# Altium PCB PCB1.PcbDoc
Units mm, origin at the board's own origin, x right, y up, seen from the top; angles counter-clockwise.
Board outline 152.4 x 101.6 mm, 4 copper layers (Top Copper, Signal Layer 1, Signal Layer 2, Bottom Copper), stack 1.57 mm thick; 28 components, 23 nets, 110 pads, 6 vias.
Unrouted connection lines stored in the file: 29.
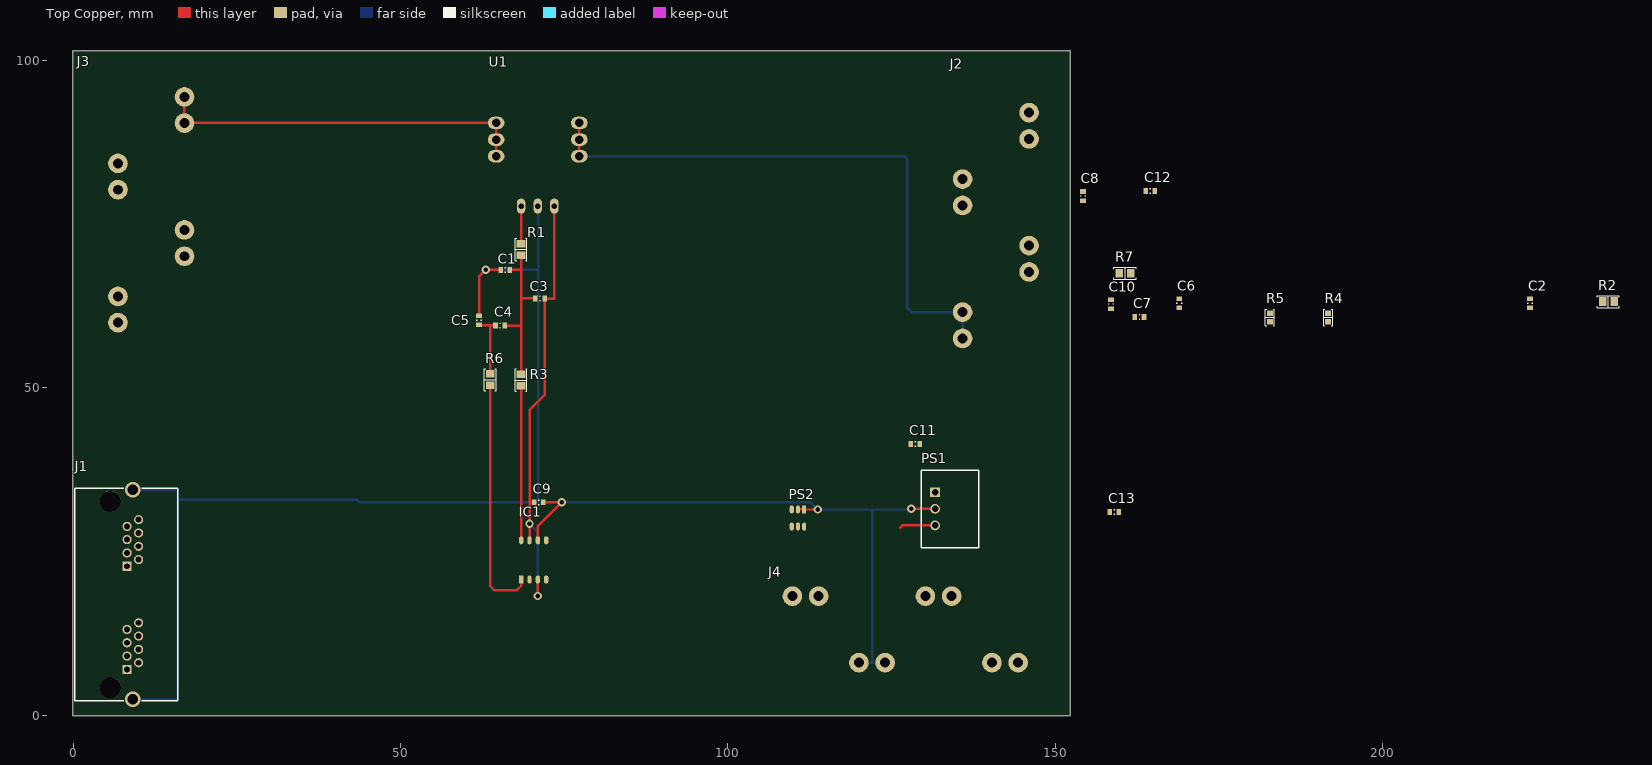
[diagram p0: Top Copper view]
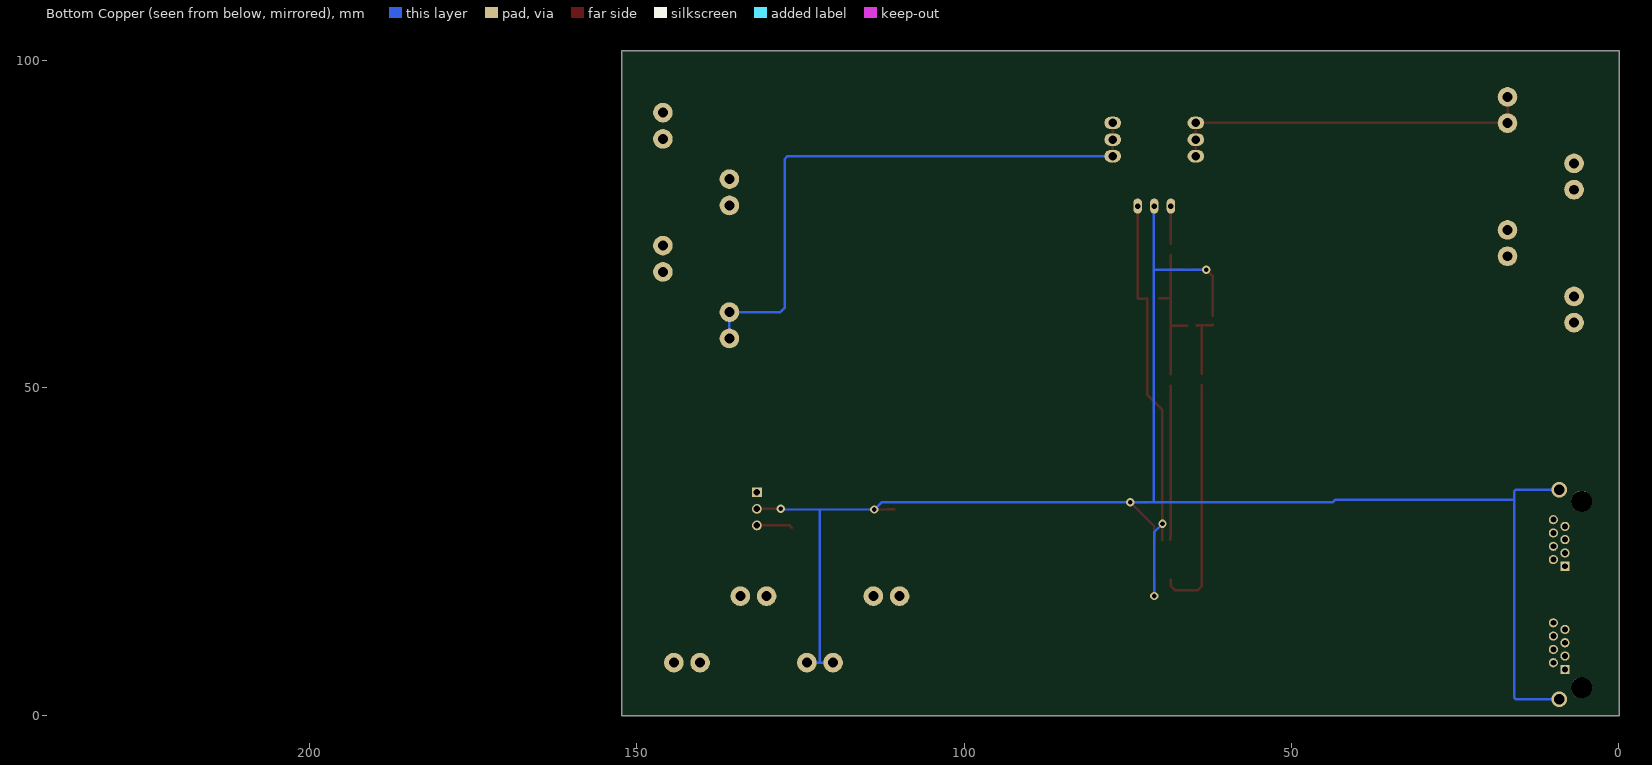
[diagram p1: Bottom Copper view, seen from below]

## Layer stack, top to bottom
Top Mask: solder mask 0.015, Solder Resist, Dk 3.8
Top Copper: signal copper 0.035
Dielectric 1: prepreg 0.2, 7628, Dk 4.6
Signal Layer 1: signal copper 0.0175
Core: core 1.065, FR-4, Dk 4.5
Signal Layer 2: signal copper 0.0175
Dielectric 2: prepreg 0.2, 7628, Dk 4.6
Bottom Copper: signal copper 0.035
Bottom Mask: solder mask 0.015, Solder Resist, Dk 3.8

## Board outline
-0.1,-0.1 152.3,-0.1 152.3,101.5 -0.1,101.5

## Design rules (kind name [scope] priority, off if disabled: settings)
BoardOutlineClearance [All] p1: gap=0.2 ignorepadtopadclearanceinfootprint=FALSE except(0.4: Arc-SplitBarrior Arc-SplitContinuation Track-SplitBarrior Track-SplitContinuation SMDPad-SplitBarrior SMDPad-SplitContinuation THPad-SplitBarrior THPad-SplitContinuation Via-SplitBarrior Via-SplitContinuation Fill-SplitBarrior Fill-SplitContinuation Poly-SplitBarrior Poly-SplitContinuation Region-SplitBarrior Region-SplitContinuation Text-SplitBarrior Text-SplitContinuation)
Clearance "Clearance Bottom Layer" [OnLayer('Bottom Layer')] p1: gap=0.203 ignorepadtopadclearanceinfootprint=TRUE except(0.254: Arc-Text Track-Text SMDPad-Text THPad-Text Via-Text Fill-Text Poly-Text Region-Text Text-Text)
Clearance "Clearance Top Layer" [OnLayer('Top Layer')] p2: gap=0.203 ignorepadtopadclearanceinfootprint=TRUE except(0.254: Arc-Text Track-Text SMDPad-Text THPad-Text Via-Text Fill-Text Poly-Text Region-Text Text-Text)
Clearance [All] p3: gap=0.2 ignorepadtopadclearanceinfootprint=FALSE except(0.089: Arc-Arc Arc-Track Arc-SMDPad Track-Track Track-SMDPad SMDPad-SMDPad; 0.127: Arc-Via Track-Via SMDPad-Via THPad-Via Via-Via; 0.254: Arc-Text Track-Text SMDPad-Text THPad-Text Via-Text Fill-Text Poly-Text Region-Text Text-Text)
HoleSize [All] p1: absolutevalues=TRUE maxlimit=6.3 minlimit=0.2 maxpercent=80.000 minpercent=20.000
MinimumAnnularRing [All] p1: minimumring=0.076
MinimumSolderMaskSliver [All] p1: minsoldermaskwidth=0.1
PolygonConnect PolygonConnect_1 [All] p1: thpad.connectstyle=Relief thpad.reliefconductorwidth=0.508 thpad.reliefentries=4 thpad.polygonreliefangle="90 Angle" thpad.airgapwidth=0.254 smdpad.connectstyle=Relief smdpad.reliefconductorwidth=0.508 smdpad.reliefentries=4 smdpad.polygonreliefangle="90 Angle" smdpad.airgapwidth=0.254 via.connectstyle=Direct via.reliefconductorwidth=0.508 via.reliefentries=4 via.polygonreliefangle="90 Angle" via.airgapwidth=0.254
RoomDefinition Spannungswandlung [InComponentClass('Spannungswandlung')] p1: confinementstyle=ConfineIn formatcopy=TRUE lockcomponents=FALSE outline -25.5,-25.5 25.3,-25.5 25.3,-0.1 -25.5,-0.1
RoomDefinition "Logik Output" [InComponentClass('Logik Output')] p2: confinementstyle=ConfineIn formatcopy=TRUE lockcomponents=FALSE outline -25.5,-25.5 25.3,-25.5 25.3,-0.1 -25.5,-0.1
RoomDefinition LEM [InComponentClass('LEM')] p3: confinementstyle=ConfineIn formatcopy=TRUE lockcomponents=FALSE outline -25.5,-25.5 25.3,-25.5 25.3,-0.1 -25.5,-0.1
RoomDefinition I/O [InComponentClass('I/O')] p4: confinementstyle=ConfineIn formatcopy=TRUE lockcomponents=FALSE outline -25.5,-25.5 25.3,-25.5 25.3,-0.1 -25.5,-0.1
RoutingCorners [All] p1: cornerstyle=Round minsetback=2.54 maxsetback=2.54
RoutingVias [All] p1: holewidth=0.5 width=1 viastyle="Through Hole" minholewidth=0.2 minwidth=0.45 maxholewidth=1 maxwidth=2
SilkToSilkClearance [All] p1: silktosilkclearance=0.1
SilkToSolderMaskClearance [IsPad] p1: minsilkscreentomaskgap=0.1 clearancetoexposedcopper=TRUE
SolderMaskExpansion [All] p1: expansion=0.102 istentingtop=FALSE
Width [All] p1: maxlimit=2.54 minlimit=0.089 preferedwidth=0.381
25 further rules are at their usual default settings.

## Classes and differential pairs
component class Spannungswandlung: C7 C8 C11 C12 PS1 PS2
component class "Logik Output": C2 C4 C5 C6 C9 C10 IC1 J1 R2 R3 R4 R5 R6 R7
component class LEM: C1 C13 R1 U1
component class I/O: J2 J3 J4

## Components (designator, comment, footprint, x,y, rotation, side; value= is the part's Value field where it differs from the comment)
C1 "0.1 µF" C_0603 66,68 r0 top
C2 "22 pF" C_0603 222.531,62.892 r90 top
C3 "2.2 nF" C_0603 71.3,63.6 r0 top
C4 "2.2 nF" C_0603 65.2,59.5 r0 top
C5 "2.2 nF" C_0603 62,60.3 r270 top
C6 "22 pF" C_0603 168.937,62.892 r90 top
C7 "1µF" C0603 162.85,60.8 r0 top
C8 "0.1 µF" C_0603 154.205,79.275 r90 top
C9 "0.1 µF" C_0603 71.1,32.5 r180 top
C10 "0.1 µF" C_0603 158.523,62.765 r90 top
C11 "1µF" C0603 128.6,41.4 r0 top
C12 "1µF" C0603 164.492,80.037 r0 top
C13 "1µF" C0603 159,31 r0 top
IC1 "ADA4940-1ARZ" ADA4940-1ARZ-R7 70.335,23.7 r90 top
J1 "RJHSE538002" RJHSE-5380-02 5.682,32.638 r270 top
J2 "39910-0104" 39910-0104 143.1,74.765 r0 top
J3 "39910-0104" 39910-0104 9.74,77.175 r180 top
J4 "39910-0104" 39910-0104 127.085,10.9 r270 top
PS1 "173010578" FDSM_SIP-3 133.9,31.5 r270 top value="5 W"
PS2 "LT6654AHS6-2.5#TRPBF" LT6654AHS6-2.5#TRPBF 110.7,30.1 r270 top
R1 "100R" R0805 68.41,71.125 r270 top (schematic designator R?)
R2 "1k" R0805 234.469,63.146 r0 top
R3 "140R" R0805 68.4,51.175 r90 top
R4 "49R9" "RES 0603_1608" 191.67,60.733 r90 top
R5 "49R9" "RES 0603_1608" 182.78,60.733 r90 top
R6 "140R" R0805 63.7,51.225 r90 top
R7 "1k" R0805 160.65,67.475 r0 top
U1 "CAS 25-NP" "CAS 25-NP/SP2_LEM" 71,87.9 r180 top

## Footprints (in the part's own frame and the unit in brackets; to place one, negate y for a bottom-side part, rotate by r counter-clockwise, add the part's x,y. Pads: shape width x height; smd on the part's side, far side on the other; paste and mask are expansions set on the pad)
39910-0104 [mm]
  round 3 hole 1.52: 1(-7.26,-17.245) 2(-7.26,-13.225) 3(2.9,-7.085) 4(2.9,-3.065) 5(-7.26,3.075) 6(-7.26,7.095) 7(2.9,13.235) 8(2.9,17.245)
  body extent -9.39,-21.13 9.4,21.03, height 28.33
ADA4940-1ARZ-R7 [mm]
  rect 1.22x0.663 smd: 1(-3,1.905)
  oval 1.22x0.663 smd: 2(-3,0.635) 3(-3,-0.635) 4(-3,-1.905) 5(3,-1.905) 6(3,-0.635) 7(3,0.635) 8(3,1.905)
  body extent -3.1,-2.5 3.1,2.5, height 1.76
C0603 [mm]
  rect 0.7x0.9 smd: 1(-0.7,0) 2(0.7,0)
  silkscreen extent -0.05,-0.35 0.05,0.35, body extent -0.87,-0.48 0.88,0.47, height 1
C_0603 [mm] "Chip Capacitor, Body 1.6x0.8mm, Height 1.0mm, IPC High Density"
  rect 0.7x0.9 smd: 1(-0.7,0) 2(0.7,0)
  silkscreen extent -0.05,-0.35 0.05,0.35, body extent -0.87,-0.47 0.88,0.48, height 1
"CAS 25-NP/SP2_LEM" [mil]
  oval 100x75 hole 51 mask+0: 1(-248.03,100) 2(-248.03,0) 9(251.97,0) 10(251.97,100)
  oval 100x75 hole 51 mask+4: 3(-248.03,-100) 8(251.97,-100)
  oval 51x91 hole 32: 11(101.97,400) 12(1.97,400) 13(-98.03,400)
  body extent -266,-403 273,459, height 630
FDSM_SIP-3 [mm] "Fixed Step Down Regulator Module, SIP-3"
  rect 1.5x1.5 hole 1: 1(-2.54,-2.25)
  round 1.5 hole 1: 2(0,-2.25) 3(2.54,-2.25)
  silkscreen extent -5.92,-4.37 5.92,4.38, body extent -5.8,-4.25 5.8,4.25, height 10.55
LT6654AHS6-2.5#TRPBF [mm]
  rect 1.22x0.62 smd: 1(-1.31,0.95)
  oval 1.22x0.62 smd: 2(-1.31,0) 3(-1.31,-0.95) 4(1.31,-0.95) 5(1.31,0) 6(1.31,0.95)
  body extent -1.38,-1.47 1.41,1.42, height 0.99
R0805 [mm]
  rect 1.15x1.35 smd: 1(-0.875,0) 2(0.875,0)
  silkscreen extent -1.7,-0.9 1.7,0.9, body extent -1,-0.62 1,0.63, height 0.6
"RES 0603_1608" [mm] "Chip Resistor, 2-Leads, Body 1.60x0.80mm, IPC Medium Density"
  rect 0.85x0.95 smd: 1(-0.65,0) 2(0.65,0)
  silkscreen extent -1.27,-0.7 1.27,0.7, body extent -0.8,-0.4 0.8,0.4, height 0.45
RJHSE-5380-02 [mm] "Modular Jack Horizontal Shielded Dual Port 8P8C Tab Up"
  rect 1.4x1.4 hole 0.9: A1(9.906,2.54) B1(25.654,2.54)
  round 1.4 hole 0.9: A2(8.89,4.318) A3(7.874,2.54) A4(6.858,4.318) A5(5.842,2.54) A6(4.826,4.318) A7(3.81,2.54) A8(2.794,4.318) B2(24.638,4.318) B3(23.622,2.54) B4(22.606,4.318) B5(21.59,2.54) B6(20.574,4.318) B7(19.558,2.54) B8(18.542,4.318)
  round 3.25 hole 3.25 unplated: MH1(0,0) MH2(28.448,0)
  round 2.4 hole 1.6: S1(-1.778,3.429) S2(30.226,3.429)
  silkscreen extent -2.03,-5.46 30.48,10.29, body extent -3.5,-5.41 31.95,10.29, height 15.06

## Part data
C1 C8 C9 C10: library part C0603X104K5RAC7411, "Capacitor 0603, 50 VDC, 0.1 µF, X7R", Device Package=0603, LCSC Part Number=C14663, Manufacturer=KEMET, Operating Temperature="-55 - 125°C", Supplier Part Number 1=80-C0603X104K5R7411, Tolerance="10 %", Voltage Rating="50 VDC", Component Type="Capacitor 0603", ComponentLink1Description=Datasheet, ComponentLink1URL=https://www.mouser.de/datasheet/2/212/1/KEM_C1013_X7R_FT_CAP_SMD-1103280.pdf, Created from=MGremer, Created On="20.12.2020 13:54:13", Last Updated="04.03.2021 09:24:28", Live Cycle Status=1, Manufacturer Part Number=C0603X104K5RAC7411, Mounting Type=SMD, PartID=3, Series="SMD Comm X7R Flex", Stock number="Labor SMD Container", Supplier 1=Mouser, Supplier 2=LCSC, Supplier Part Number 2=C14663, Type=Capacitor
C2 C6: library part C0603C220J5RACTU, "Capacitor 0603, 50 VDC, 22 pF, X7R", Device Package=0603, Manufacturer=KEMET, Operating Temperature="-55 - 125°C", Supplier Part Number 1=80-C0603C220J5R, Tolerance="5 %", Voltage Rating="50 VDC", Component Type="Capacitor 0603", ComponentLink1Description=Datasheet, ComponentLink1URL=https://www.mouser.de/datasheet/2/212/KEM_C1002_X7R_SMD-1102033.pdf, Created from=MGremer, Created On="20.12.2020 13:54:13", Last Updated="20.01.2021 13:57:36", Live Cycle Status=1, Manufacturer Part Number=C0603C220J5RACTU, Mounting Type=SMD, PartID=78, Series="SMD Comm X7R", Stock number="not stored", Supplier 1=Mouser, Type=Capacitor
C3 C4 C5: library part 06035C222JAT2A, "Capacitor 0603, 50 VDC, 2.2 nF, X7R", Device Package=0603, Manufacturer=AVX, Operating Temperature="-55 - 125°C", Supplier Part Number 1=581-06035C222J, Tolerance="5 %", Voltage Rating="50 VDC", Component Type="Capacitor 0603", ComponentLink1Description=Datasheet, ComponentLink1URL=https://www.mouser.de/datasheet/2/40/X7RDielectric-777024.pdf, Created from=MGremer, Created On="20.12.2020 13:54:13", Last Updated="20.01.2021 13:57:36", Live Cycle Status=1, Manufacturer Part Number=06035C222JAT2A, Mounting Type=SMD, PartID=77, Series="MLCC X7R", Stock number="not stored", Supplier 1=Mouser, Type=Capacitor
C7 C11 C12 C13: library part GRT188R61H105KE13D, "Multilayer Ceramic Capacitors MLCC - SMD/SMT 0603 50Vdc 1.0uF X5R 10%", Capacitance=1uF, Case Code (Imperial)=0603, Case Code (Metric)=1608, Dielectric=X5R, Manufacturer=Murata, Max Operating Temperature=85°C, Min Operating Temperature=-55°C, Ratings=AEC-Q200, Supplier Part Number 1=81-GRT188R61H105KE3D, Tolerance=10%, Voltage Rating=50V, Case/Package=0603, Category="Ceramic Capacitors", ComponentLink1Description=http://www.farnell.com/datasheets/2165959.pdf?src-supplier=Farnell, ComponentLink1URL=http://www.farnell.com/datasheets/2165959.pdf?src-supplier=Farnell, ComponentLink2Description=http://www.farnell.com/datasheets/2165959.pdf?src-supplier=Newark, ComponentLink2URL=http://www.farnell.com/datasheets/2165959.pdf?src-supplier=Newark, ComponentLink3Description=http://search.murata.co.jp/Ceramy/image/img/A01X/G101/ENG/GRT188R61H105KE13-01.pdf?src-supplier=Digi-Key, ComponentLink3URL=http://search.murata.co.jp/Ceramy/image/img/A01X/G101/ENG/GRT188R61H105KE13-01.pdf?src-supplier=Digi-Key, ComponentLink4Description=https://search.murata.co.jp/Ceramy/image/img/A01X/G101/ENG/GRT188R61H105KE13-01.pdf?src-supplier=Digi-Key, ComponentLink4URL=https://search.murata.co.jp/Ceramy/image/img/A01X/G101/ENG/GRT188R61H105KE13-01.pdf?src-supplier=Digi-Key, Length=0.063inch, Manufacturer Part Number=GRT188R61H105KE13D, Mount="Surface Mount", Packaging="Tape and Reel", Pricing 1="1=0,26000, 10=0,10800, 50=0,10800, 100=0,09100, 500=0,06200, 1000=0,05500, 2000=0,05400, 4000=0,04700, 10000=0,04700 (USD)", RoHS=Yes, RoHS Compliant=Yes, Stock 1=769371, Supplier 1=Mouser, Thickness=0.035inch, Voltage Rating (DC)=50V, Width=0.031inch
IC1: library part ADA4940-1ARZ_1, "IC OPAMP DIFF 260MHZ 8SOIC", Case/Package=SOIC, Input Bias Current=1.1uA, Input Offset Voltage (Vos)=60uV, Input Resistance=50MR, Manufacturer="Analog Devices", Max Operating Temperature=125°C, Max Supply Current=13.5uA, Max Supply Voltage=6V, Min Operating Temperature=-40°C, Min Supply Voltage=3V, Nominal Supply Current=1.25mA, Operating Supply Current=1.18mA, Operating Supply Voltage=5V, Output Current per Channel=46mA, Package Quantity=98, Power Supply Rejection Ratio (PSRR)=80dB, Supplier Part Number 1=584-ADA4940-1ARZ, Test Frequency=50kHz, -3db Bandwidth=260MHz, Amplifier Type=DIFFERENTIAL, Bandwidth=260MHz, Category="Amplifiers - Op Amps, Buffer, Instrumentation", Common Mode Rejection Ratio=86dB, ComponentLink1Description=https://datasheet.ciiva.com/1578/ada4940-1-4940-2-1578032.pdf?src-supplier=Newark, ComponentLink1URL=https://datasheet.ciiva.com/1578/ada4940-1-4940-2-1578032.pdf?src-supplier=Newark, ComponentLink2Description=https://datasheet.ciiva.com/15129/getdatasheetpartid-486836-15129044.pdf?src-supplier=Verical, ComponentLink2URL=https://datasheet.ciiva.com/15129/getdatasheetpartid-486836-15129044.pdf?src-supplier=Verical, ComponentLink3Description=https://datasheet.ciiva.com/1485/1790104-1485202.pdf?src-supplier=Element14, ComponentLink3URL=https://datasheet.ciiva.com/1485/1790104-1485202.pdf?src-supplier=Element14, ComponentLink4Description=https://datasheet.ciiva.com/8036/1790104-8036687.pdf?src-supplier=Element14, ComponentLink4URL=https://datasheet.ciiva.com/8036/1790104-8036687.pdf?src-supplier=Element14, ComponentLink5Description=https://datasheet.ciiva.com/2965/ada4940-1-4940-2-2965446.pdf?src-supplier=Avnet, ComponentLink5URL=https://datasheet.ciiva.com/2965/ada4940-1-4940-2-2965446.pdf?src-supplier=Avnet, ComponentLink6Description=https://datasheet.ciiva.com/1808/ada4940-1-4940-2-1808830.pdf?src-supplier=Digi-Key, ComponentLink6URL=https://datasheet.ciiva.com/1808/ada4940-1-4940-2-1808830.pdf?src-supplier=Digi-Key, Contact Plating=Tin,Matte, Gain Bandwidth Product=260MHz, Height=1.5mm, Lead Free="Contains Lead", Length=5mm, Manufacturer Part Number=ADA4940-1ARZ, Number of Amplifiers=1, Number of Channels=1, Number of Circuits=1, Number of Elements=1, Number of Pins=8, Packaging=Rail/Tube, Pricing 1="1=5,14000, 10=4,62000, 50=4,37000, 100=3,78000, 1000=3,21000, 10000=2,74000 (USD)", Quiescent Current=1.18mA, Radiation Hardening=No, REACH SVHC="No SVHC", RoHS=Yes, RoHS Compliant=Yes, Series=-, Settling Time=34ns, Slew Rate=95V/µs, Stock 1=3938, Supplier 1=Mouser, Supply Current=1.25mA, Width=4mm
J1: "CAT5, RJ45 Connector, 1x2", Device Package=RJ45, Manufacturer=Amphenol, Supplier Part Number 1=1860605, Component Type="RJ45 Connector", ComponentLink1Description=Datasheet, ComponentLink1URL=https://www.farnell.com/cad/2360382.pdf, Created from=MGremer, Created On="22.02.2021 16:43:38", Last Updated="22.02.2021 16:43:38", Live Cycle Status=1, Manufacturer Part Number=RJHSE538002, Mounting Type=THT, PartID=4, Series=RJHSE, Stock number="not stored", Supplier 1=Farnell, Type="RJ45 Connector"
J2 J3 J4: "10.16mm Beau Eurostyle Fixed Mount PCB Terminal Block High Voltage High Power 60A 4 Circuits", Manufacturer=Molex, Supplier Part Number 1=WM5966-ND, Category="Terminal Blocks", ComponentLink1Description=https://datasheet.ciiva.com/5187/0399100104-terminal-blocks-167725-5187186.pdf?src-supplier=Mouser, ComponentLink1URL=https://datasheet.ciiva.com/5187/0399100104-terminal-blocks-167725-5187186.pdf?src-supplier=Mouser, Manufacturer Part Number=39910-0104, Pricing 1="1=14,50000, 10=12,75600, 25=12,03160, 50=11,45160, 100=11,23410, 250=9,78456, 500=9,42218, 1000=9,05979 (USD)", RoHS=Yes, Stock 1=845, Supplier 1=Digi-Key
PS1: "Not isolated DCDC Converter 5 V Output, 1 A, 8 - 28 V Input", Device Package=FDSM, Manufacturer="Wuerth Elektronik", Supplier Part Number 1=710-173010578, Component Type="Not isolated DCDC Converter", ComponentLink1Description=Datasheet, ComponentLink1URL=https://www.mouser.de/datasheet/2/445/173010578-1716125.pdf, Created from=MGremer, Created On="06.01.2021 09:48:37", Last Updated="06.05.2021 06:17:55", Live Cycle Status=1, Manufacturer Part Number=173010578, Mounting Type=THT, PartID=11, Series=MagI3C-FDSM, Stock number="not stored", Supplier 1=Mouser, Type="not isolated DCDC converter"
PS2: "IC VREF SERIES 2.5V TSOT23-6", Case/Package=SOT-23-6, Manufacturer="Analog Devices / Linear Technology", Max Operating Temperature=125°C, Max Output Voltage=2.5V, Min Operating Temperature=-40°C, Operating Supply Current=600uA, Output Current=10mA, Package Quantity=2500, Supplier Part Number 1=584-6654AHS6-2.5TPF, Temperature Coefficient=10ppm/°C, Tolerance=0.05%, Category="Voltage References", ComponentLink1Description=https://datasheet.ciiva.com/2010/29677-2010606.pdf?src-supplier=Digi-Key, ComponentLink1URL=https://datasheet.ciiva.com/2010/29677-2010606.pdf?src-supplier=Digi-Key, Manufacturer Part Number=LT6654AHS6-2.5#TRPBF, Min Output Voltage=2.5V, Mount="Surface Mount", Number of Pins=6, Output Type=Fixed, Packaging="Tape and Reel", Pricing 1="1=7,17000, 10=6,48000, 50=6,17000, 100=5,36000, 1000=4,26000, 10000=4,25000 (USD)", Reference Type=Series, RoHS=Yes, RoHS Compliant=Yes, Series=-, Stock 1=177, Supplier 1=Mouser
R1: library part CR0805-FX-1000ELF, "Res Thick Film 0805 100 Ohm 1% 1/8W ±100ppm/°C Molded SMD SMD Paper Tape on Plastic Reel", Case Code (Imperial)=0805, Case Code (Metric)=2012, Manufacturer=Bourns, Max Operating Temperature=155°C, Max Power Dissipation=125mW, Min Operating Temperature=-55°C, Package Quantity=1, Resistance Tolerance=1%, Resistor Type="Thick Film", Supplier Part Number 1=652-CR0805FX-1000ELF, Temperature Coefficient=100ppm/°C, Voltage Rating=150V, Case/Package=0805, Category="Chip SMD Resistors", ComponentLink1Description=https://datasheet.ciiva.com/11809/0900766b80fcdb72-11809178.pdf?src-supplier=RSComponents, ComponentLink1URL=https://datasheet.ciiva.com/11809/0900766b80fcdb72-11809178.pdf?src-supplier=RSComponents, ComponentLink2Description=https://datasheet.ciiva.com/6547/chpreztr-6547413.pdf?src-supplier=Digi-Key, ComponentLink2URL=https://datasheet.ciiva.com/6547/chpreztr-6547413.pdf?src-supplier=Digi-Key, ComponentLink3Description=https://datasheet.ciiva.com/6547/chpreztr-6547414.pdf?src-supplier=Digi-Key, ComponentLink3URL=https://datasheet.ciiva.com/6547/chpreztr-6547414.pdf?src-supplier=Digi-Key, ComponentLink4Description=https://datasheet.ciiva.com/6547/chpreztr-6547415.pdf?src-supplier=Digi-Key, ComponentLink4URL=https://datasheet.ciiva.com/6547/chpreztr-6547415.pdf?src-supplier=Digi-Key, ComponentLink5Description=https://datasheet.ciiva.com/9120/chpreztr-9120744.pdf?src-supplier=Avnet, ComponentLink5URL=https://datasheet.ciiva.com/9120/chpreztr-9120744.pdf?src-supplier=Avnet, Construction=Rectangular, Contact Plating=Tin, Depth=1.25mm, Features="Moisture Resistant", Height=0.5mm, Length=2mm, Manufacturer Part Number=CR0805-FX-1000ELF, Military Standard=Not, Mount="Surface Mount", Number of Pins=2, Number of Terminations=2, Packaging="Tape and Reel", Power Rating=125mW, Pricing 1="1=0,10000, 10=0,02900, 50=0,02900, 100=0,01200, 1000=0,00600, 10000=0,00300 (USD)", Radiation Hardening=No, REACH SVHC="No SVHC", Resistance=100R, RoHS=Yes, RoHS Compliant=Yes, Series=CR0805, Stock 1=943038, Supplier 1=Mouser, Technology="THICK FILM", Termination=SMD/SMT, Thickness=508um, Tolerance=1%, Voltage Rating (DC)=150V, Width=1.25mm
R2 R7: library part CR0805-FX-1001ELF, "Res Thick Film 0805 1 kOhm 1% 0.125W(1/8W) ±100ppm/C Molded SMD Paper Tape on Plastic Reel", Case Code (Imperial)=0805, Case Code (Metric)=2012, Manufacturer=Bourns, Manufacturer Part Number=CR0805-FX-1400ELF, Max Operating Temperature=155°C, Max Power Dissipation=125mW, Min Operating Temperature=-55°C, Package Quantity=5000, Resistance=140R, Resistor Type="Thick Film", Temperature Coefficient=100ppm/°C, Tolerance=1%, Voltage Rating=150V, Case/Package=0805, Category="Chip SMD Resistors", ComponentLink1Description=https://datasheet.ciiva.com/9120/chpreztr-9120519.pdf?src-supplier=Avnet, ComponentLink1URL=https://datasheet.ciiva.com/9120/chpreztr-9120519.pdf?src-supplier=Avnet, ComponentLink2Description=https://datasheet.ciiva.com/14985/chpreztr-14985975.pdf?src-supplier=Digi-Key, ComponentLink2URL=https://datasheet.ciiva.com/14985/chpreztr-14985975.pdf?src-supplier=Digi-Key, Construction=Rectangular, Contact Plating=Tin, Depth=1.25mm, Features="Moisture Resistant", Height=0.024inch, Length=2mm, Military Standard=Not, Mount="Surface Mount", Number of Terminations=2, Packaging="Tape and Reel", Power Rating=125mW, Pricing 1="1=0,10000, 10=0,02900, 50=0,02900, 100=0,01200, 1000=0,00600, 10000=0,00400 (USD)", Radiation Hardening=No, RoHS=Yes, RoHS Compliant=Yes, Series=CR0805, Stock 1=33845, Supplier 1="Arrow Electronics", Supplier Part Number 1=CR0805-FX-1001ELF, Termination=SMD/SMT, Thickness=508um, Width=1.25mm
R3 R6: library part CR0805-FX-1400ELF, "Res Thick Film 0805 140 Ohm 1% 0.125W(1/8W) ±100ppm/C Molded SMD Paper Tape on Plastic Reel", Case Code (Imperial)=0805, Case Code (Metric)=2012, Manufacturer=Bourns, Max Operating Temperature=155°C, Max Power Dissipation=125mW, Min Operating Temperature=-55°C, Package Quantity=5000, Resistor Type="Thick Film", Supplier Part Number 1=652-CR0805FX-1400ELF, Temperature Coefficient=100ppm/°C, Tolerance=1%, Voltage Rating=150V, Case/Package=0805, Category="Chip SMD Resistors", ComponentLink1Description=https://datasheet.ciiva.com/9120/chpreztr-9120519.pdf?src-supplier=Avnet, ComponentLink1URL=https://datasheet.ciiva.com/9120/chpreztr-9120519.pdf?src-supplier=Avnet, ComponentLink2Description=https://datasheet.ciiva.com/14985/chpreztr-14985975.pdf?src-supplier=Digi-Key, ComponentLink2URL=https://datasheet.ciiva.com/14985/chpreztr-14985975.pdf?src-supplier=Digi-Key, Construction=Rectangular, Contact Plating=Tin, Depth=1.25mm, Features="Moisture Resistant", Height=0.024inch, Length=2mm, Manufacturer Part Number=CR0805-FX-1400ELF, Military Standard=Not, Mount="Surface Mount", Number of Terminations=2, Packaging="Tape and Reel", Power Rating=125mW, Pricing 1="1=0,10000, 10=0,02900, 50=0,02900, 100=0,01200, 1000=0,00600, 10000=0,00400 (USD)", Radiation Hardening=No, Resistance=140R, RoHS=Yes, RoHS Compliant=Yes, Series=CR0805, Stock 1=33845, Supplier 1=Mouser, Termination=SMD/SMT, Thickness=508um, Width=1.25mm
R4 R5: library part RN73H1JTTD49R9F100, "SMD resistor 1%", Device Package=0603, Manufacturer="KOA Speer", Supplier Part Number 1=660-RN73H1JT49R9F100, Tolerance=1%, Component Type="SMD resistor", ComponentLink1Description=Datasheet, ComponentLink1URL=https://www.mouser.de/datasheet/2/219/RN73H-1843478.pdf, Created from=MGremer, Created On="14.12.2020 16:17:14", Last Updated="02.07.2021 11:49:34", Live Cycle Status=1, Manufacturer Part Number=RN73H1JTTD49R9F100, Mounting Type=SMD, PartID=189, Stock number="not stored", Supplier 1=Mouser, Type=Resistor
U1: "Current Sensor 25A 1 Channel Flux Gate, Closed Loop Bidirectional Module", Mfr_Name=LEM, Supplier Part Number 1=398-1089-5-ND, Copyright="Copyright (C) 2022 Ultra Librarian. All rights reserved.", Digi-Key_Part_Number_1=398-1089-5-ND, Manufacturer_Part_Number="CAS 25-NP", RefDes=RefDes, Supplier 1=Digi-Key, Type=DEV

## Via types
v1: diameter 1.27, hole 0.711, Top Copper to Bottom Copper, 6 vias

## Nets (pads, with @x,y where several pads share a name; then routed paths per layer and width w, separated by ;. In a path a pad name is that pad's centre, name@x,y a point inside that pad or via, vN(x,y) a via of type N, cw(c..) or ccw(c..) an arc to the next point about the centre after c; other vN are vias at no path point)
A7: J1.A7 R4.1
GND: C1.1 C5.1 C8.2 C9.1 C10.1 IC1.6 J1.S1 J1.S2 J4.3 J4.4 PS1.2 PS2.1 PS2.2 U1.12 | length 265.4
  Top Copper w0.381: C5.1 62,67 v1(63,68) C1.1 ; IC1.6 70.97,28.87 v1(74.6,32.5) C9.1 ; PS2.2 110.705,31.405 111.65,31.405 111.655,31.4 v1(113.7,31.4) ; v1(128,31.5) PS1.2 PS1.2@131.6,31.45
  Bottom Copper w0.381: J1.S2 15.712,2.412 16,2.7 16,32.9 ; J1.S1 15.777,34.416 16,34.193 16,32.9 ; v1(63,68) 71,68 ; U1.12 71,77.69 71,68 ; J4.3 122.01,8 ; J4.4 122.01,8 ; v1(128,31.5) 127.9,31.4 122.01,31.4 ; 16,32.9 43.3,32.9 43.7,32.5 71,32.5 ; 71,32.5 v1(74.6,32.5) 112.6,32.5 v1(113.7,31.4) 122.01,31.4 ; 71,32.5 71,68 ; 122.01,8 122.01,31.4
IN_+: C2.2 IC1.8 R2.2 R3.1 | length 23.6
  Top Copper w0.381: R3.1@68.41,50.3 68.41,27.24 68.541,27.109 IC1.8@68.541,26.754
IN_-: C6.2 IC1.1 R6.1 R7.2 | length 36.9
  Top Copper w0.381: R6.1 63.7,19.7 64.3,19.1 67.8,19.1 68.43,19.73 IC1.1
NetC3_2: C3.2 C9.2 IC1.3 IC1.7 PS1.3 U1.13 | length 73.7
  Top Copper w0.381: IC1.7 v1(69.7,29.2) 69.7,32.5 ; C9.2 69.7,32.5 ; v1(70.97,18.2) IC1.3 ; C3.2 72,48.899 69.7,46.599 69.7,32.5 ; C3.2@72.1,63.7 72.2,63.6 73.5,63.6 73.5,69 73.49,69.01 U1.13 U1.13@73.445,77.695 ; 126.3,28.6 126.66,28.96 PS1.3
  Bottom Copper w0.381: v1(69.7,29.2) 70.97,27.93 v1(70.97,18.2)
NetC4_1: C4.1 C5.2 R6.2 | length 10
  Top Copper w0.381: C5.2 62.05,59.55 63.7,59.55 ; R6.2 63.7,52.4 63.7,59.55 ; C4.1 64.45,59.55 63.7,59.55
NetC7_17: C10.2 IC1.2 PS2.6
NetC8_1: C8.1 J4.1 J4.2 PS1.1 PS2.4
NetJ1_A8: J1.A8 R5.1
NetJ2_1: J2.1 J2.2 U1.1 U1.2 U1.3 | length 90.8
  Top Copper w0.381: U1.1 U1.2 U1.3
  Bottom Copper w0.381: U1.1 126.94,85.36 127.4,84.9 127.4,62.2 128.06,61.54 J2.2 J2.1
NetJ2_3: J2.3 J2.4
NetJ2_5: J2.5 J2.6
NetJ2_7: J2.7 J2.8
NetJ3_1: J3.1 J3.2 U1.8 U1.9 U1.10 | length 56.7
  Top Copper w0.381: J3.2 J3.2@17,90.44 ; J3.1 J3.2@17,90.44 ; U1.10 U1.9 U1.8 J3.2@17,90.44
NetJ3_3: J3.3 J3.4
NetJ3_5: J3.5 J3.6
NetJ3_7: J3.7 J3.8
NetJ4_5: J4.5 J4.6
NetJ4_7: J4.7 J4.8
NetR?_1: R1.1 U1.11 | length 5.7
  Top Copper w0.381: R1.1 U1.11
OUT_+: C2.1 IC1.5 R2.1 R4.2
OUT_-: C6.1 IC1.4 R5.2 R7.1
V_LEM: C1.2 C3.1 C4.2 R1.2 R3.2 | length 24.2
  Top Copper w0.381: C4.2 68.41,59.5 ; C1.2 68.41,68 ; R3.2@68.41,52.05 68.41,59.5 ; R1.2 68.41,68 ; 70.2,63.65 68.46,63.65 68.41,63.6 ; 68.41,59.5 68.41,63.6 ; 68.41,63.6 68.41,68
pads on no net: C7.1 C7.2 C11.1 C11.2 C12.1 C12.2 C13.1 C13.2 J1.A1 J1.A2 J1.A3 J1.A4 J1.A5 J1.A6 J1.B1 J1.B2 J1.B3 J1.B4 J1.B5 J1.B6 J1.B7 J1.B8 J1.MH1 J1.MH2 PS2.3 PS2.5